# Altium PCB P003_LED_Strip.PcbDoc (part 1 of 2)
Units mil, origin at the board's own origin, x right, y up, seen from the top; angles counter-clockwise.
Board outline 19680 x 580 mil, 2 copper layers (Top Layer, Bottom Layer), stack 61.6 mil thick; 160 components, 143 nets, 416 pads, 60 vias.
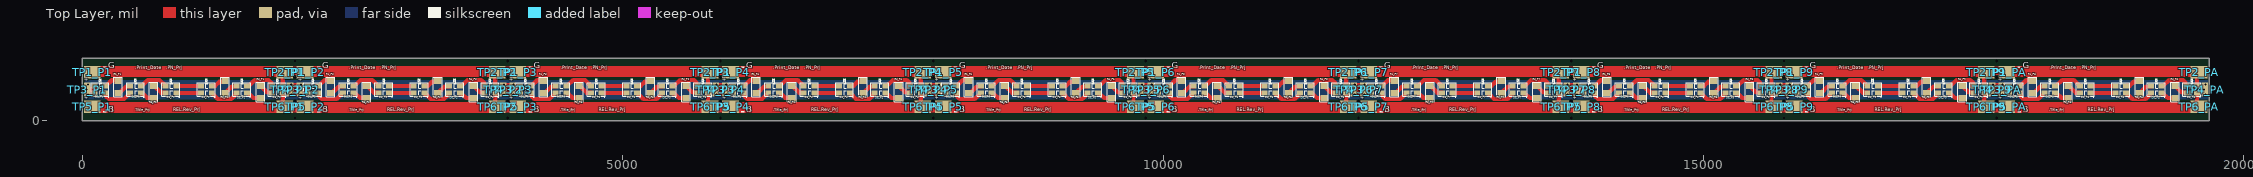
[diagram p0: Top Layer view]
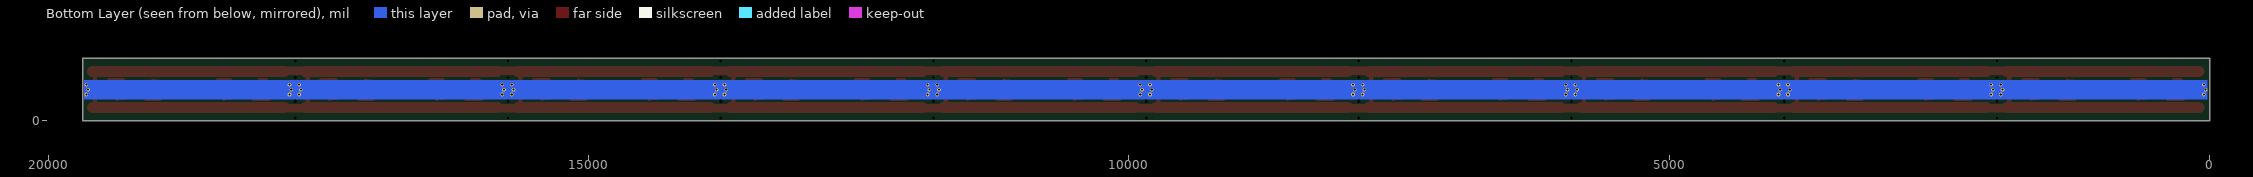
[diagram p1: Bottom Layer view, seen from below]
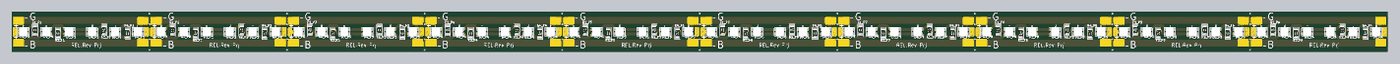
[diagram p3: 3D render of the assembled board from above, using the file's embedded part models]

## Layer stack, top to bottom
Top Solder: solder mask 0.4, Solder Resist, Dk 3.5
Top Layer: signal copper 1.4
Dielectric 1: core 58.8, FR-4, Dk 4.2
Bottom Layer: signal copper 1.4
Bottom Solder: solder mask 0.4, Solder Resist, Dk 3.5

## Board outline
0,0 0,580 19680,580 19680,0

## Design rules (kind name [scope] priority, off if disabled: settings)
BoardOutlineClearance [All] p1: gap=8 ignorepadtopadclearanceinfootprint=FALSE
Clearance Clearance_PadVia [IsPad vs IsVia] p1: gap=10 ignorepadtopadclearanceinfootprint=FALSE except(0: Arc-Hole Track-Hole SMDPad-Hole THPad-Hole Via-Hole Fill-Hole Poly-Hole Region-Hole Text-Hole)
Clearance Clearance_Polygon [InPolygon] p2: gap=20 ignorepadtopadclearanceinfootprint=FALSE except(0: Arc-Hole Track-Hole SMDPad-Hole THPad-Hole Via-Hole Fill-Hole Poly-Hole Region-Hole Text-Hole)
Clearance Clearance_std [All] p3: gap=8 ignorepadtopadclearanceinfootprint=FALSE except(0: Arc-Hole Track-Hole SMDPad-Hole THPad-Hole Via-Hole Fill-Hole Poly-Hole Region-Hole Text-Hole)
ComponentClearance [All] p1: gap=4 collisioncheckmode=3 verticalgap=10 showdistances=FALSE
Height [All] p1: minheight=0 maxheight=1200 prefheight=500
HoleSize [All] p1: absolutevalues=TRUE maxlimit=200 minlimit=12 maxpercent=80.000 minpercent=20.000
MinimumSolderMaskSliver [All] p1: minsoldermaskwidth=0
PolygonConnect PolygonConnect_via [IsVia] p1: connectstyle=Direct reliefconductorwidth=10 reliefentries=4 polygonreliefangle="90 Angle" airgapwidth=10
PolygonConnect PolygonConnect_std [All] p2: connectstyle=Relief reliefconductorwidth=10 reliefentries=4 polygonreliefangle="90 Angle" airgapwidth=10
RoomDefinition PA [InComponentClass('PA')] p1: confinementstyle=ConfineIn formatcopy=TRUE lockcomponents=FALSE outline 17712,0 19680,0 19680,580 17712,580
RoomDefinition P9 [InComponentClass('P9')] p2: confinementstyle=ConfineIn formatcopy=TRUE lockcomponents=FALSE outline 15744,0 17712,0 17712,580 15744,580
RoomDefinition P8 [InComponentClass('P8')] p3: confinementstyle=ConfineIn formatcopy=TRUE lockcomponents=FALSE outline 13776,0 15744,0 15744,580 13776,580
RoomDefinition P7 [InComponentClass('P7')] p4: confinementstyle=ConfineIn formatcopy=TRUE lockcomponents=FALSE outline 11808,0 13776,0 13776,580 11808,580
RoomDefinition P6 [InComponentClass('P6')] p5: confinementstyle=ConfineIn formatcopy=TRUE lockcomponents=FALSE outline 9840,0 11808,0 11808,580 9840,580
RoomDefinition P5 [InComponentClass('P5')] p6: confinementstyle=ConfineIn formatcopy=TRUE lockcomponents=FALSE outline 7872,0 9840,0 9840,580 7872,580
RoomDefinition P4 [InComponentClass('P4')] p7: confinementstyle=ConfineIn formatcopy=TRUE lockcomponents=FALSE outline 5904,0 7872,0 7872,580 5904,580
RoomDefinition P3 [InComponentClass('P3')] p8: confinementstyle=ConfineIn formatcopy=TRUE lockcomponents=FALSE outline 3936,0 5904,0 5904,580 3936,580
RoomDefinition P2 [InComponentClass('P2')] p9: confinementstyle=ConfineIn formatcopy=TRUE lockcomponents=FALSE outline 1968,0 3936,0 3936,580 1968,580
RoomDefinition P1 [InComponentClass('P1')] p10: confinementstyle=ConfineIn formatcopy=FALSE lockcomponents=FALSE outline 0,0 1968,0 1968,580 0,580
RoutingVias [All] p1: holewidth=20 width=42 viastyle="Through Hole" minholewidth=14 minwidth=30 maxholewidth=32 maxwidth=70
SilkToSilkClearance [All] p1: silktosilkclearance=1
SilkToSolderMaskClearance SilkToSolderMaskClearance_via [IsVia] p1: minsilkscreentomaskgap=1 clearancetoexposedcopper=TRUE
SilkToSolderMaskClearance SilkToSolderMaskClearance_pad [IsPad] p2: minsilkscreentomaskgap=1 clearancetoexposedcopper=TRUE
SolderMaskExpansion [All] p1: expansion=4 istentingtop=FALSE
UnRoutedNet [All] p1: checkbadconnections=TRUE
Width [All] p1: maxlimit=200 minlimit=10 preferedwidth=20
23 further rules are at their usual default settings.

## Classes and differential pairs
channel class LED1: P1 P2 P3 P4 P5 P6 P7 P8 P9 PA
component class PA: D1_PA D2_PA D3_PA D4_PA D5_PA D6_PA R1_PA R2_PA R3_PA R4_PA TP1_PA TP2_PA TP3_PA TP4_PA TP5_PA TP6_PA
component class P9: D1_P9 D2_P9 D3_P9 D4_P9 D5_P9 D6_P9 R1_P9 R2_P9 R3_P9 R4_P9 TP1_P9 TP2_P9 TP3_P9 TP4_P9 TP5_P9 TP6_P9
component class P8: D1_P8 D2_P8 D3_P8 D4_P8 D5_P8 D6_P8 R1_P8 R2_P8 R3_P8 R4_P8 TP1_P8 TP2_P8 TP3_P8 TP4_P8 TP5_P8 TP6_P8
component class P7: D1_P7 D2_P7 D3_P7 D4_P7 D5_P7 D6_P7 R1_P7 R2_P7 R3_P7 R4_P7 TP1_P7 TP2_P7 TP3_P7 TP4_P7 TP5_P7 TP6_P7
component class P6: D1_P6 D2_P6 D3_P6 D4_P6 D5_P6 D6_P6 R1_P6 R2_P6 R3_P6 R4_P6 TP1_P6 TP2_P6 TP3_P6 TP4_P6 TP5_P6 TP6_P6
component class P5: D1_P5 D2_P5 D3_P5 D4_P5 D5_P5 D6_P5 R1_P5 R2_P5 R3_P5 R4_P5 TP1_P5 TP2_P5 TP3_P5 TP4_P5 TP5_P5 TP6_P5
component class P4: D1_P4 D2_P4 D3_P4 D4_P4 D5_P4 D6_P4 R1_P4 R2_P4 R3_P4 R4_P4 TP1_P4 TP2_P4 TP3_P4 TP4_P4 TP5_P4 TP6_P4
component class P3: D1_P3 D2_P3 D3_P3 D4_P3 D5_P3 D6_P3 R1_P3 R2_P3 R3_P3 R4_P3 TP1_P3 TP2_P3 TP3_P3 TP4_P3 TP5_P3 TP6_P3
component class P2: D1_P2 D2_P2 D3_P2 D4_P2 D5_P2 D6_P2 R1_P2 R2_P2 R3_P2 R4_P2 TP1_P2 TP2_P2 TP3_P2 TP4_P2 TP5_P2 TP6_P2
component class P1: D1_P1 D2_P1 D3_P1 D4_P1 D5_P1 D6_P1 R1_P1 R2_P1 R3_P1 R4_P1 TP1_P1 TP2_P1 TP3_P1 TP4_P1 TP5_P1 TP6_P1

## Components (designator, comment, footprint, x,y, rotation, side; value= is the part's Value field where it differs from the comment)
D1_P1 "JNJ-3030SX30101400" LED_3030_4P_1 164,290 r0 top (schematic designator D1)
D1_P2 "JNJ-3030SX30101400" LED_3030_4P_1 2132,290 r0 top (schematic designator D1)
D1_P3 "JNJ-3030SX30101400" LED_3030_4P_1 4100,290 r0 top (schematic designator D1)
D1_P4 "JNJ-3030SX30101400" LED_3030_4P_1 6068,290 r0 top (schematic designator D1)
D1_P5 "JNJ-3030SX30101400" LED_3030_4P_1 8036,290 r0 top (schematic designator D1)
D1_P6 "JNJ-3030SX30101400" LED_3030_4P_1 10004,290 r0 top (schematic designator D1)
D1_P7 "JNJ-3030SX30101400" LED_3030_4P_1 11972,290 r0 top (schematic designator D1)
D1_P8 "JNJ-3030SX30101400" LED_3030_4P_1 13940,290 r0 top (schematic designator D1)
D1_P9 "JNJ-3030SX30101400" LED_3030_4P_1 15908,290 r0 top (schematic designator D1)
D1_PA "JNJ-3030SX30101400" LED_3030_4P_1 17876,290 r0 top (schematic designator D1)
D2_P1 "JNJ-3030SX30101400" LED_3030_4P_1 492,290 r0 top (schematic designator D2)
D2_P2 "JNJ-3030SX30101400" LED_3030_4P_1 2460,290 r0 top (schematic designator D2)
D2_P3 "JNJ-3030SX30101400" LED_3030_4P_1 4428,290 r0 top (schematic designator D2)
D2_P4 "JNJ-3030SX30101400" LED_3030_4P_1 6396,290 r0 top (schematic designator D2)
D2_P5 "JNJ-3030SX30101400" LED_3030_4P_1 8364,290 r0 top (schematic designator D2)
D2_P6 "JNJ-3030SX30101400" LED_3030_4P_1 10332,290 r0 top (schematic designator D2)
D2_P7 "JNJ-3030SX30101400" LED_3030_4P_1 12300,290 r0 top (schematic designator D2)
D2_P8 "JNJ-3030SX30101400" LED_3030_4P_1 14268,290 r0 top (schematic designator D2)
D2_P9 "JNJ-3030SX30101400" LED_3030_4P_1 16236,290 r0 top (schematic designator D2)
D2_PA "JNJ-3030SX30101400" LED_3030_4P_1 18204,290 r0 top (schematic designator D2)
D3_P1 "JNJ-3030SX30101400" LED_3030_4P_1 820,290 r0 top (schematic designator D3)
D3_P2 "JNJ-3030SX30101400" LED_3030_4P_1 2788,290 r0 top (schematic designator D3)
D3_P3 "JNJ-3030SX30101400" LED_3030_4P_1 4756,290 r0 top (schematic designator D3)
D3_P4 "JNJ-3030SX30101400" LED_3030_4P_1 6724,290 r0 top (schematic designator D3)
D3_P5 "JNJ-3030SX30101400" LED_3030_4P_1 8692,290 r0 top (schematic designator D3)
D3_P6 "JNJ-3030SX30101400" LED_3030_4P_1 10660,290 r0 top (schematic designator D3)
D3_P7 "JNJ-3030SX30101400" LED_3030_4P_1 12628,290 r0 top (schematic designator D3)
D3_P8 "JNJ-3030SX30101400" LED_3030_4P_1 14596,290 r0 top (schematic designator D3)
D3_P9 "JNJ-3030SX30101400" LED_3030_4P_1 16564,290 r0 top (schematic designator D3)
D3_PA "JNJ-3030SX30101400" LED_3030_4P_1 18532,290 r0 top (schematic designator D3)
D4_P1 "JNJ-3030SX30101400" LED_3030_4P_1 1148,290 r0 top (schematic designator D4)
D4_P2 "JNJ-3030SX30101400" LED_3030_4P_1 3116,290 r0 top (schematic designator D4)
D4_P3 "JNJ-3030SX30101400" LED_3030_4P_1 5084,290 r0 top (schematic designator D4)
D4_P4 "JNJ-3030SX30101400" LED_3030_4P_1 7052,290 r0 top (schematic designator D4)
D4_P5 "JNJ-3030SX30101400" LED_3030_4P_1 9020,290 r0 top (schematic designator D4)
D4_P6 "JNJ-3030SX30101400" LED_3030_4P_1 10988,290 r0 top (schematic designator D4)
D4_P7 "JNJ-3030SX30101400" LED_3030_4P_1 12956,290 r0 top (schematic designator D4)
D4_P8 "JNJ-3030SX30101400" LED_3030_4P_1 14924,290 r0 top (schematic designator D4)
D4_P9 "JNJ-3030SX30101400" LED_3030_4P_1 16892,290 r0 top (schematic designator D4)
D4_PA "JNJ-3030SX30101400" LED_3030_4P_1 18860,290 r0 top (schematic designator D4)
D5_P1 "JNJ-3030SX30101400" LED_3030_4P_1 1476,290 r0 top (schematic designator D5)
D5_P2 "JNJ-3030SX30101400" LED_3030_4P_1 3444,290 r0 top (schematic designator D5)
D5_P3 "JNJ-3030SX30101400" LED_3030_4P_1 5412,290 r0 top (schematic designator D5)
D5_P4 "JNJ-3030SX30101400" LED_3030_4P_1 7380,290 r0 top (schematic designator D5)
D5_P5 "JNJ-3030SX30101400" LED_3030_4P_1 9348,290 r0 top (schematic designator D5)
D5_P6 "JNJ-3030SX30101400" LED_3030_4P_1 11316,290 r0 top (schematic designator D5)
D5_P7 "JNJ-3030SX30101400" LED_3030_4P_1 13284,290 r0 top (schematic designator D5)
D5_P8 "JNJ-3030SX30101400" LED_3030_4P_1 15252,290 r0 top (schematic designator D5)
D5_P9 "JNJ-3030SX30101400" LED_3030_4P_1 17220,290 r0 top (schematic designator D5)
D5_PA "JNJ-3030SX30101400" LED_3030_4P_1 19188,290 r0 top (schematic designator D5)
D6_P1 "JNJ-3030SX30101400" LED_3030_4P_1 1804,290 r0 top (schematic designator D6)
D6_P2 "JNJ-3030SX30101400" LED_3030_4P_1 3772,290 r0 top (schematic designator D6)
D6_P3 "JNJ-3030SX30101400" LED_3030_4P_1 5740,290 r0 top (schematic designator D6)
D6_P4 "JNJ-3030SX30101400" LED_3030_4P_1 7708,290 r0 top (schematic designator D6)
D6_P5 "JNJ-3030SX30101400" LED_3030_4P_1 9676,290 r0 top (schematic designator D6)
D6_P6 "JNJ-3030SX30101400" LED_3030_4P_1 11644,290 r0 top (schematic designator D6)
D6_P7 "JNJ-3030SX30101400" LED_3030_4P_1 13612,290 r0 top (schematic designator D6)
D6_P8 "JNJ-3030SX30101400" LED_3030_4P_1 15580,290 r0 top (schematic designator D6)
D6_P9 "JNJ-3030SX30101400" LED_3030_4P_1 17548,290 r0 top (schematic designator D6)
D6_PA "JNJ-3030SX30101400" LED_3030_4P_1 19516,290 r0 top (schematic designator D6)
R1_P1 "120R" RES_CHIP_3216[1206]_N 330,313 r90 top (schematic designator R1)
R1_P2 "120R" RES_CHIP_3216[1206]_N 2298,313 r90 top (schematic designator R1)
R1_P3 "120R" RES_CHIP_3216[1206]_N 4266,313 r90 top (schematic designator R1)
R1_P4 "120R" RES_CHIP_3216[1206]_N 6234,313 r90 top (schematic designator R1)
R1_P5 "120R" RES_CHIP_3216[1206]_N 8202,313 r90 top (schematic designator R1)
R1_P6 "120R" RES_CHIP_3216[1206]_N 10170,313 r90 top (schematic designator R1)
R1_P7 "120R" RES_CHIP_3216[1206]_N 12138,313 r90 top (schematic designator R1)
R1_P8 "120R" RES_CHIP_3216[1206]_N 14106,313 r90 top (schematic designator R1)
R1_P9 "120R" RES_CHIP_3216[1206]_N 16074,313 r90 top (schematic designator R1)
R1_PA "120R" RES_CHIP_3216[1206]_N 18042,313 r90 top (schematic designator R1)
R2_P1 "120R" RES_CHIP_3216[1206]_N 1320,313 r90 top (schematic designator R2)
R2_P2 "120R" RES_CHIP_3216[1206]_N 3288,313 r90 top (schematic designator R2)
R2_P3 "120R" RES_CHIP_3216[1206]_N 5256,313 r90 top (schematic designator R2)
R2_P4 "120R" RES_CHIP_3216[1206]_N 7224,313 r90 top (schematic designator R2)
R2_P5 "120R" RES_CHIP_3216[1206]_N 9192,313 r90 top (schematic designator R2)
R2_P6 "120R" RES_CHIP_3216[1206]_N 11160,313 r90 top (schematic designator R2)
R2_P7 "120R" RES_CHIP_3216[1206]_N 13128,313 r90 top (schematic designator R2)
R2_P8 "120R" RES_CHIP_3216[1206]_N 15096,313 r90 top (schematic designator R2)
R2_P9 "120R" RES_CHIP_3216[1206]_N 17064,313 r90 top (schematic designator R2)
R2_PA "120R" RES_CHIP_3216[1206]_N 19032,313 r90 top (schematic designator R2)
R3_P1 "120R" RES_CHIP_3216[1206]_N 660,267 r270 top (schematic designator R3)
R3_P2 "120R" RES_CHIP_3216[1206]_N 2628,267 r270 top (schematic designator R3)
R3_P3 "120R" RES_CHIP_3216[1206]_N 4596,267 r270 top (schematic designator R3)
R3_P4 "120R" RES_CHIP_3216[1206]_N 6564,267 r270 top (schematic designator R3)
R3_P5 "120R" RES_CHIP_3216[1206]_N 8532,267 r270 top (schematic designator R3)
R3_P6 "120R" RES_CHIP_3216[1206]_N 10500,267 r270 top (schematic designator R3)
R3_P7 "120R" RES_CHIP_3216[1206]_N 12468,267 r270 top (schematic designator R3)
R3_P8 "120R" RES_CHIP_3216[1206]_N 14436,267 r270 top (schematic designator R3)
R3_P9 "120R" RES_CHIP_3216[1206]_N 16404,267 r270 top (schematic designator R3)
R3_PA "120R" RES_CHIP_3216[1206]_N 18372,267 r270 top (schematic designator R3)
R4_P1 "120R" RES_CHIP_3216[1206]_N 1650,267 r270 top (schematic designator R4)
R4_P2 "120R" RES_CHIP_3216[1206]_N 3618,267 r270 top (schematic designator R4)
R4_P3 "120R" RES_CHIP_3216[1206]_N 5586,267 r270 top (schematic designator R4)
R4_P4 "120R" RES_CHIP_3216[1206]_N 7554,267 r270 top (schematic designator R4)
R4_P5 "120R" RES_CHIP_3216[1206]_N 9522,267 r270 top (schematic designator R4)
R4_P6 "120R" RES_CHIP_3216[1206]_N 11490,267 r270 top (schematic designator R4)
R4_P7 "120R" RES_CHIP_3216[1206]_N 13458,267 r270 top (schematic designator R4)
R4_P8 "120R" RES_CHIP_3216[1206]_N 15426,267 r270 top (schematic designator R4)
R4_P9 "120R" RES_CHIP_3216[1206]_N 17394,267 r270 top (schematic designator R4)
R4_PA "120R" RES_CHIP_3216[1206]_N 19362,267 r270 top (schematic designator R4)
TP1_P1 "CP_154x114MIL" TST_CP_154x114MIL 93,450 r0 top (schematic designator TP1)
TP1_P2 "CP_154x114MIL" TST_CP_154x114MIL 2061,450 r0 top (schematic designator TP1)
TP1_P3 "CP_154x114MIL" TST_CP_154x114MIL 4029,450 r0 top (schematic designator TP1)
TP1_P4 "CP_154x114MIL" TST_CP_154x114MIL 5997,450 r0 top (schematic designator TP1)
TP1_P5 "CP_154x114MIL" TST_CP_154x114MIL 7965,450 r0 top (schematic designator TP1)
TP1_P6 "CP_154x114MIL" TST_CP_154x114MIL 9933,450 r0 top (schematic designator TP1)
TP1_P7 "CP_154x114MIL" TST_CP_154x114MIL 11901,450 r0 top (schematic designator TP1)
TP1_P8 "CP_154x114MIL" TST_CP_154x114MIL 13869,450 r0 top (schematic designator TP1)
TP1_P9 "CP_154x114MIL" TST_CP_154x114MIL 15837,450 r0 top (schematic designator TP1)
TP1_PA "CP_154x114MIL" TST_CP_154x114MIL 17805,450 r0 top (schematic designator TP1)
TP2_P1 "CP_154x114MIL" TST_CP_154x114MIL 1872,450 r0 top (schematic designator TP2)
TP2_P2 "CP_154x114MIL" TST_CP_154x114MIL 3840,450 r0 top (schematic designator TP2)
TP2_P3 "CP_154x114MIL" TST_CP_154x114MIL 5808,450 r0 top (schematic designator TP2)
TP2_P4 "CP_154x114MIL" TST_CP_154x114MIL 7776,450 r0 top (schematic designator TP2)
TP2_P5 "CP_154x114MIL" TST_CP_154x114MIL 9744,450 r0 top (schematic designator TP2)
TP2_P6 "CP_154x114MIL" TST_CP_154x114MIL 11712,450 r0 top (schematic designator TP2)
TP2_P7 "CP_154x114MIL" TST_CP_154x114MIL 13680,450 r0 top (schematic designator TP2)
TP2_P8 "CP_154x114MIL" TST_CP_154x114MIL 15648,450 r0 top (schematic designator TP2)
TP2_P9 "CP_154x114MIL" TST_CP_154x114MIL 17616,450 r0 top (schematic designator TP2)
TP2_PA "CP_154x114MIL" TST_CP_154x114MIL 19584,450 r0 top (schematic designator TP2)
TP3_P1 "CP_64x132MIL" TST_CP_64X132MIL_1 46,289 r180 top (schematic designator TP3)
TP3_P2 "CP_64x132MIL" TST_CP_64X132MIL_1 2014,289 r180 top (schematic designator TP3)
TP3_P3 "CP_64x132MIL" TST_CP_64X132MIL_1 3982,289 r180 top (schematic designator TP3)
TP3_P4 "CP_64x132MIL" TST_CP_64X132MIL_1 5950,289 r180 top (schematic designator TP3)
TP3_P5 "CP_64x132MIL" TST_CP_64X132MIL_1 7918,289 r180 top (schematic designator TP3)
TP3_P6 "CP_64x132MIL" TST_CP_64X132MIL_1 9886,289 r180 top (schematic designator TP3)
TP3_P7 "CP_64x132MIL" TST_CP_64X132MIL_1 11854,289 r180 top (schematic designator TP3)
TP3_P8 "CP_64x132MIL" TST_CP_64X132MIL_1 13822,289 r180 top (schematic designator TP3)
TP3_P9 "CP_64x132MIL" TST_CP_64X132MIL_1 15790,289 r180 top (schematic designator TP3)
TP3_PA "CP_64x132MIL" TST_CP_64X132MIL_1 17758,289 r180 top (schematic designator TP3)
TP4_P1 "CP_64x132MIL" TST_CP_64X132MIL_1 1925,289 r180 top (schematic designator TP4)
TP4_P2 "CP_64x132MIL" TST_CP_64X132MIL_1 3893,289 r180 top (schematic designator TP4)
TP4_P3 "CP_64x132MIL" TST_CP_64X132MIL_1 5861,289 r180 top (schematic designator TP4)
TP4_P4 "CP_64x132MIL" TST_CP_64X132MIL_1 7829,289 r180 top (schematic designator TP4)
TP4_P5 "CP_64x132MIL" TST_CP_64X132MIL_1 9797,289 r180 top (schematic designator TP4)
TP4_P6 "CP_64x132MIL" TST_CP_64X132MIL_1 11765,289 r180 top (schematic designator TP4)
TP4_P7 "CP_64x132MIL" TST_CP_64X132MIL_1 13733,289 r180 top (schematic designator TP4)
TP4_P8 "CP_64x132MIL" TST_CP_64X132MIL_1 15701,289 r180 top (schematic designator TP4)
TP4_P9 "CP_64x132MIL" TST_CP_64X132MIL_1 17669,289 r180 top (schematic designator TP4)
TP4_PA "CP_64x132MIL" TST_CP_64X132MIL_1 19637,289 r180 top (schematic designator TP4)
TP5_P1 "CP_154x114MIL" TST_CP_154x114MIL 93,130 r0 top (schematic designator TP5)
TP5_P2 "CP_154x114MIL" TST_CP_154x114MIL 2061,130 r0 top (schematic designator TP5)
TP5_P3 "CP_154x114MIL" TST_CP_154x114MIL 4029,130 r0 top (schematic designator TP5)
TP5_P4 "CP_154x114MIL" TST_CP_154x114MIL 5997,130 r0 top (schematic designator TP5)
TP5_P5 "CP_154x114MIL" TST_CP_154x114MIL 7965,130 r0 top (schematic designator TP5)
TP5_P6 "CP_154x114MIL" TST_CP_154x114MIL 9933,130 r0 top (schematic designator TP5)
TP5_P7 "CP_154x114MIL" TST_CP_154x114MIL 11901,130 r0 top (schematic designator TP5)
TP5_P8 "CP_154x114MIL" TST_CP_154x114MIL 13869,130 r0 top (schematic designator TP5)
TP5_P9 "CP_154x114MIL" TST_CP_154x114MIL 15837,130 r0 top (schematic designator TP5)
TP5_PA "CP_154x114MIL" TST_CP_154x114MIL 17805,130 r0 top (schematic designator TP5)
TP6_P1 "CP_154x114MIL" TST_CP_154x114MIL 1872,130 r0 top (schematic designator TP6)
TP6_P2 "CP_154x114MIL" TST_CP_154x114MIL 3840,130 r0 top (schematic designator TP6)
TP6_P3 "CP_154x114MIL" TST_CP_154x114MIL 5808,130 r0 top (schematic designator TP6)
TP6_P4 "CP_154x114MIL" TST_CP_154x114MIL 7776,130 r0 top (schematic designator TP6)
TP6_P5 "CP_154x114MIL" TST_CP_154x114MIL 9744,130 r0 top (schematic designator TP6)
TP6_P6 "CP_154x114MIL" TST_CP_154x114MIL 11712,130 r0 top (schematic designator TP6)
TP6_P7 "CP_154x114MIL" TST_CP_154x114MIL 13680,130 r0 top (schematic designator TP6)
TP6_P8 "CP_154x114MIL" TST_CP_154x114MIL 15648,130 r0 top (schematic designator TP6)
TP6_P9 "CP_154x114MIL" TST_CP_154x114MIL 17616,130 r0 top (schematic designator TP6)
TP6_PA "CP_154x114MIL" TST_CP_154x114MIL 19584,130 r0 top (schematic designator TP6)

## Footprints (in the part's own frame and the unit in brackets; to place one, negate y for a bottom-side part, rotate by r counter-clockwise, add the part's x,y. Pads: shape width x height; smd on the part's side, far side on the other; paste and mask are expansions set on the pad)
LED_3030_4P_1 [mil] "SMD 3030 4 pin"
  rect 55x48 smd: A1(-49.5,32) A2(-49.5,-32) C1(49.5,32) C2(49.5,-32)
  silkscreen extent -83,-72 83,99, body extent -59,-59 59,59, height 22
RES_CHIP_3216[1206]_N [mil] "1206 Chip Resistor; Body 3.2 x 1.6 mm (LxW typ), Nominal"
  rect 54x68 smd: 1(-56,0) 2(56,0)
  silkscreen extent -89,-40 89,40, body extent -63,-31 63,32, height 22
TST_CP_64X132MIL_1 [mil] "64x*132 mil rectangular connection point"
  rect 62x132 smd paste-99999: 1(0,0)
TST_CP_154x114MIL [mil] "154x*114 mil rectangular connection point"
  rect 154x114 smd paste-99999: 1(0,0)

## Part data
D1_P1 D1_P2 D1_P3 D1_P4 D1_P5 D1_P6 D1_P7 D1_P8 D1_P9 D1_PA D2_P1 D2_P2 D2_P3 D2_P4 D2_P5 D2_P6 D2_P7 D2_P8 D2_P9 D2_PA D3_P1 D3_P2 D3_P3 D3_P4 D3_P5 D3_P6 D3_P7 D3_P8 D3_P9 D3_PA D4_P1 D4_P2 D4_P3 D4_P4 D4_P5 D4_P6 D4_P7 D4_P8 D4_P9 D4_PA D5_P1 D5_P2 D5_P3 D5_P4 D5_P5 D5_P6 D5_P7 D5_P8 D5_P9 D5_PA D6_P1 D6_P2 D6_P3 D6_P4 D6_P5 D6_P6 D6_P7 D6_P8 D6_P9 D6_PA: library part 15, "Dual LED, 3030 4 pin package", Current=150mA, Manufacturer="JNJ Optoelectronics", Voltage=3.1V, Alternates="Guangzhou Mingyi Optoelectronics: 854-1", ComponentLink1Description="Component web page", ComponentLink1URL=https://www.lcsc.com/product-detail/C19185854.html?s_z=s_C19185854, ID=15, Manufacturer P/N=JNJ-3030SX30101400, Part Number=JNJ-3030SX30101400, Pin Count=4, Published Date=2025-08-29, Publisher=YE, SMD/THD=SMD
R1_P1 R1_P2 R1_P3 R1_P4 R1_P5 R1_P6 R1_P7 R1_P8 R1_P9 R1_PA R2_P1 R2_P2 R2_P3 R2_P4 R2_P5 R2_P6 R2_P7 R2_P8 R2_P9 R2_PA R3_P1 R3_P2 R3_P3 R3_P4 R3_P5 R3_P6 R3_P7 R3_P8 R3_P9 R3_PA R4_P1 R4_P2 R4_P3 R4_P4 R4_P5 R4_P6 R4_P7 R4_P8 R4_P9 R4_PA: library part 43, "120 ohm, 1206, 250 mW, 200 V, %10", Package Reference=1206, Part Number=120R_1206, Power=250mW, Tolerance(%)=10, Voltage=200V, ID=43, Pin Count=2, Published Date=19.03.2021, Publisher=YE, SMD/THD=SMD, Type 1=Film
TP1_P1 TP1_P2 TP1_P3 TP1_P4 TP1_P5 TP1_P6 TP1_P7 TP1_P8 TP1_P9 TP1_PA TP2_P1 TP2_P2 TP2_P3 TP2_P4 TP2_P5 TP2_P6 TP2_P7 TP2_P8 TP2_P9 TP2_PA TP5_P1 TP5_P2 TP5_P3 TP5_P4 TP5_P5 TP5_P6 TP5_P7 TP5_P8 TP5_P9 TP5_PA TP6_P1 TP6_P2 TP6_P3 TP6_P4 TP6_P5 TP6_P6 TP6_P7 TP6_P8 TP6_P9 TP6_PA: library part 4, "no via", ID=4, Part Number=CP_154x114MIL, Pin Count=1, Published Date=2025-08-29, Publisher=YE, SMD/THD=Manual
TP3_P1 TP3_P2 TP3_P3 TP3_P4 TP3_P5 TP3_P6 TP3_P7 TP3_P8 TP3_P9 TP3_PA TP4_P1 TP4_P2 TP4_P3 TP4_P4 TP4_P5 TP4_P6 TP4_P7 TP4_P8 TP4_P9 TP4_PA: library part 5, "includes 3 vias", ID=5, Part Number=CP_64x132MIL, Pin Count=1, Published Date=2025-08-29, Publisher=YE, SMD/THD=Manual

## Free pads (board coordinates)
  round 10 hole 30 unplated: 1(1968,26) 1(1968,180) 1(1968,400) 1(1968,554) 1(3936,26) 1(3936,180) 1(3936,400) 1(3936,554) 1(5904,26) 1(5904,180) 1(5904,400) 1(5904,554) 1(7872,26) 1(7872,180) 1(7872,400) 1(7872,554) 1(9840,26) 1(9840,180) 1(9840,400) 1(9840,554) 1(11808,26) 1(11808,180) 1(11808,400) 1(11808,554) 1(13776,26) 1(13776,180) 1(13776,400) 1(13776,554) 1(15744,26) 1(15744,180) 1(15744,400) 1(15744,554) 1(17712,26) 1(17712,180) 1(17712,400) 1(17712,554)

## Via types
v1: diameter 34, hole 20, Top Layer to Bottom Layer, tented both sides, 60 vias

## Nets (pads, with @x,y where several pads share a name; then routed paths per layer and width w, separated by ;. In a path a pad name is that pad's centre, name@x,y a point inside that pad or via, vN(x,y) a via of type N, cw(c..) or ccw(c..) an arc to the next point about the centre after c; other vN are vias at no path point)
NetD1_P1_C1: D1_P1.C1 R1_P1.2 | length 127.7
  Top Layer w40: D1_P1.C1@223,326 273,376 R1_P1.2@330,376
NetD1_P1_C2: D1_P1.C2 D2_P1.A2 | length 293.2
  Top Layer w40: D1_P1.C2@214.5,258 218,258 222,254 222,227 247,202 386,202 438,254 441.5,254 D2_P1.A2@445.5,258
NetD1_P2_C1: D1_P2.C1 R1_P2.2 | length 127.7
  Top Layer w40: D1_P2.C1@2191,326 2241,376 R1_P2.2@2298,376
NetD1_P2_C2: D1_P2.C2 D2_P2.A2 | length 293.2
  Top Layer w40: D1_P2.C2@2182.5,258 2186,258 2190,254 2190,227 2215,202 2354,202 2406,254 2409.5,254 D2_P2.A2@2413.5,258
NetD1_P3_C1: D1_P3.C1 R1_P3.2 | length 127.7
  Top Layer w40: D1_P3.C1@4159,326 4209,376 R1_P3.2@4266,376
NetD1_P3_C2: D1_P3.C2 D2_P3.A2 | length 293.2
  Top Layer w40: D1_P3.C2@4150.5,258 4154,258 4158,254 4158,227 4183,202 4322,202 4374,254 4377.5,254 D2_P3.A2@4381.5,258
NetD1_P4_C1: D1_P4.C1 R1_P4.2 | length 127.7
  Top Layer w40: D1_P4.C1@6127,326 6177,376 R1_P4.2@6234,376
NetD1_P4_C2: D1_P4.C2 D2_P4.A2 | length 293.2
  Top Layer w40: D1_P4.C2@6118.5,258 6122,258 6126,254 6126,227 6151,202 6290,202 6342,254 6345.5,254 D2_P4.A2@6349.5,258
NetD1_P5_C1: D1_P5.C1 R1_P5.2 | length 127.7
  Top Layer w40: D1_P5.C1@8095,326 8145,376 R1_P5.2@8202,376
NetD1_P5_C2: D1_P5.C2 D2_P5.A2 | length 293.2
  Top Layer w40: D1_P5.C2@8086.5,258 8090,258 8094,254 8094,227 8119,202 8258,202 8310,254 8313.5,254 D2_P5.A2@8317.5,258
NetD1_P6_C1: D1_P6.C1 R1_P6.2 | length 127.7
  Top Layer w40: D1_P6.C1@10063,326 10113,376 R1_P6.2@10170,376
NetD1_P6_C2: D1_P6.C2 D2_P6.A2 | length 293.2
  Top Layer w40: D1_P6.C2@10054.5,258 10058,258 10062,254 10062,227 10087,202 10226,202 10278,254 10281.5,254 D2_P6.A2@10285.5,258
NetD1_P7_C1: D1_P7.C1 R1_P7.2 | length 127.7
  Top Layer w40: D1_P7.C1@12031,326 12081,376 R1_P7.2@12138,376
NetD1_P7_C2: D1_P7.C2 D2_P7.A2 | length 293.2
  Top Layer w40: D1_P7.C2@12022.5,258 12026,258 12030,254 12030,227 12055,202 12194,202 12246,254 12249.5,254 D2_P7.A2@12253.5,258
NetD1_P8_C1: D1_P8.C1 R1_P8.2 | length 127.7
  Top Layer w40: D1_P8.C1@13999,326 14049,376 R1_P8.2@14106,376
NetD1_P8_C2: D1_P8.C2 D2_P8.A2 | length 293.2
  Top Layer w40: D1_P8.C2@13990.5,258 13994,258 13998,254 13998,227 14023,202 14162,202 14214,254 14217.5,254 D2_P8.A2@14221.5,258
NetD1_P9_C1: D1_P9.C1 R1_P9.2 | length 127.7
  Top Layer w40: D1_P9.C1@15967,326 16017,376 R1_P9.2@16074,376
NetD1_P9_C2: D1_P9.C2 D2_P9.A2 | length 293.2
  Top Layer w40: D1_P9.C2@15958.5,258 15962,258 15966,254 15966,227 15991,202 16130,202 16182,254 16185.5,254 D2_P9.A2@16189.5,258
NetD1_PA_C1: D1_PA.C1 R1_PA.2 | length 127.7
  Top Layer w40: D1_PA.C1@17935,326 17985,376 R1_PA.2@18042,376
NetD1_PA_C2: D1_PA.C2 D2_PA.A2 | length 293.2
  Top Layer w40: D1_PA.C2@17926.5,258 17930,258 17934,254 17934,227 17959,202 18098,202 18150,254 18153.5,254 D2_PA.A2@18157.5,258
NetD2_P1_A1: D2_P1.A1 R1_P1.1 | length 139.5
  Top Layer w40: R1_P1.1@330,264 350,264 404,318 441.5,318 D2_P1.A1@445.5,322
NetD2_P1_C1: D2_P1.C1 D3_P1.A1 | length 277.4
  Top Layer w40: D2_P1.C1@541.5,322 545.5,326 554,326 606,378 714.5,378 763,329.5 763,326 767,322 D3_P1.A1@770.5,322
NetD2_P1_C2: D2_P1.C2 R3_P1.2 | length 140.9
  Top Layer w40: D2_P1.C2@541.5,258 545.5,254 559,254 598.07,214.93 649.07,214.93 R3_P1.2@660,204
NetD2_P2_A1: D2_P2.A1 R1_P2.1 | length 139.5
  Top Layer w40: R1_P2.1@2298,264 2318,264 2372,318 2409.5,318 D2_P2.A1@2413.5,322
NetD2_P2_C1: D2_P2.C1 D3_P2.A1 | length 277.4
  Top Layer w40: D2_P2.C1@2509.5,322 2513.5,326 2522,326 2574,378 2682.5,378 2731,329.5 2731,326 2735,322 D3_P2.A1@2738.5,322
NetD2_P2_C2: D2_P2.C2 R3_P2.2 | length 140.9
  Top Layer w40: D2_P2.C2@2509.5,258 2513.5,254 2527,254 2566.07,214.93 2617.07,214.93 R3_P2.2@2628,204
NetD2_P3_A1: D2_P3.A1 R1_P3.1 | length 139.5
  Top Layer w40: R1_P3.1@4266,264 4286,264 4340,318 4377.5,318 D2_P3.A1@4381.5,322
NetD2_P3_C1: D2_P3.C1 D3_P3.A1 | length 277.4
  Top Layer w40: D2_P3.C1@4477.5,322 4481.5,326 4490,326 4542,378 4650.5,378 4699,329.5 4699,326 4703,322 D3_P3.A1@4706.5,322
NetD2_P3_C2: D2_P3.C2 R3_P3.2 | length 140.9
  Top Layer w40: D2_P3.C2@4477.5,258 4481.5,254 4495,254 4534.07,214.93 4585.07,214.93 R3_P3.2@4596,204
NetD2_P4_A1: D2_P4.A1 R1_P4.1 | length 139.5
  Top Layer w40: R1_P4.1@6234,264 6254,264 6308,318 6345.5,318 D2_P4.A1@6349.5,322
NetD2_P4_C1: D2_P4.C1 D3_P4.A1 | length 277.4
  Top Layer w40: D2_P4.C1@6445.5,322 6449.5,326 6458,326 6510,378 6618.5,378 6667,329.5 6667,326 6671,322 D3_P4.A1@6674.5,322
NetD2_P4_C2: D2_P4.C2 R3_P4.2 | length 140.9
  Top Layer w40: D2_P4.C2@6445.5,258 6449.5,254 6463,254 6502.07,214.93 6553.07,214.93 R3_P4.2@6564,204
NetD2_P5_A1: D2_P5.A1 R1_P5.1 | length 139.5
  Top Layer w40: R1_P5.1@8202,264 8222,264 8276,318 8313.5,318 D2_P5.A1@8317.5,322
NetD2_P5_C1: D2_P5.C1 D3_P5.A1 | length 277.4
  Top Layer w40: D2_P5.C1@8413.5,322 8417.5,326 8426,326 8478,378 8586.5,378 8635,329.5 8635,326 8639,322 D3_P5.A1@8642.5,322
NetD2_P5_C2: D2_P5.C2 R3_P5.2 | length 140.9
  Top Layer w40: D2_P5.C2@8413.5,258 8417.5,254 8431,254 8470.07,214.93 8521.07,214.93 R3_P5.2@8532,204
NetD2_P6_A1: D2_P6.A1 R1_P6.1 | length 139.5
  Top Layer w40: R1_P6.1@10170,264 10190,264 10244,318 10281.5,318 D2_P6.A1@10285.5,322
NetD2_P6_C1: D2_P6.C1 D3_P6.A1 | length 277.4
  Top Layer w40: D2_P6.C1@10381.5,322 10385.5,326 10394,326 10446,378 10554.5,378 10603,329.5 10603,326 10607,322 D3_P6.A1@10610.5,322
NetD2_P6_C2: D2_P6.C2 R3_P6.2 | length 140.9
  Top Layer w40: D2_P6.C2@10381.5,258 10385.5,254 10399,254 10438.07,214.93 10489.07,214.93 R3_P6.2@10500,204
NetD2_P7_A1: D2_P7.A1 R1_P7.1 | length 139.5
  Top Layer w40: R1_P7.1@12138,264 12158,264 12212,318 12249.5,318 D2_P7.A1@12253.5,322